# Altium PCB battery_module.PcbDoc
Units mm, origin at the board's own origin, x right, y up, seen from the top; angles counter-clockwise.
Board outline 90 x 25 mm, 2 copper layers (Top Layer, Bottom Layer), stack 2.021 mm thick; 2 components, 2 nets, 6 pads, 2 vias.
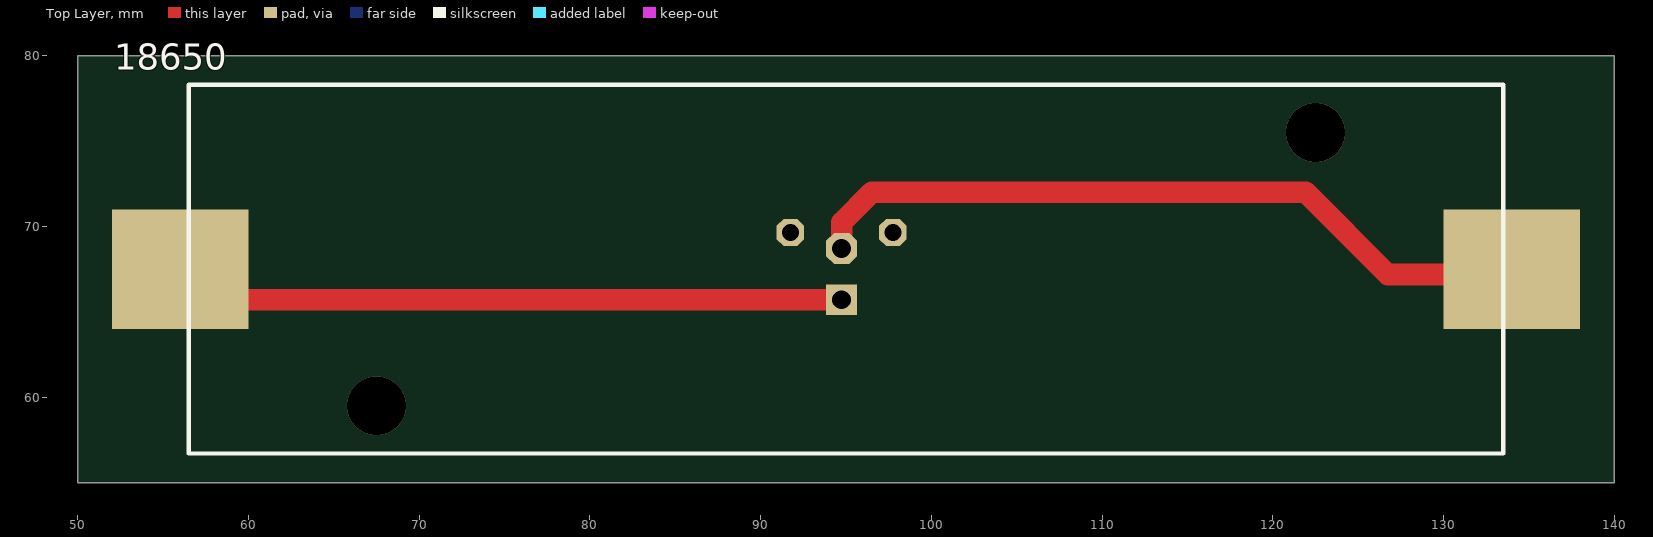
[diagram p0: Top Layer view]
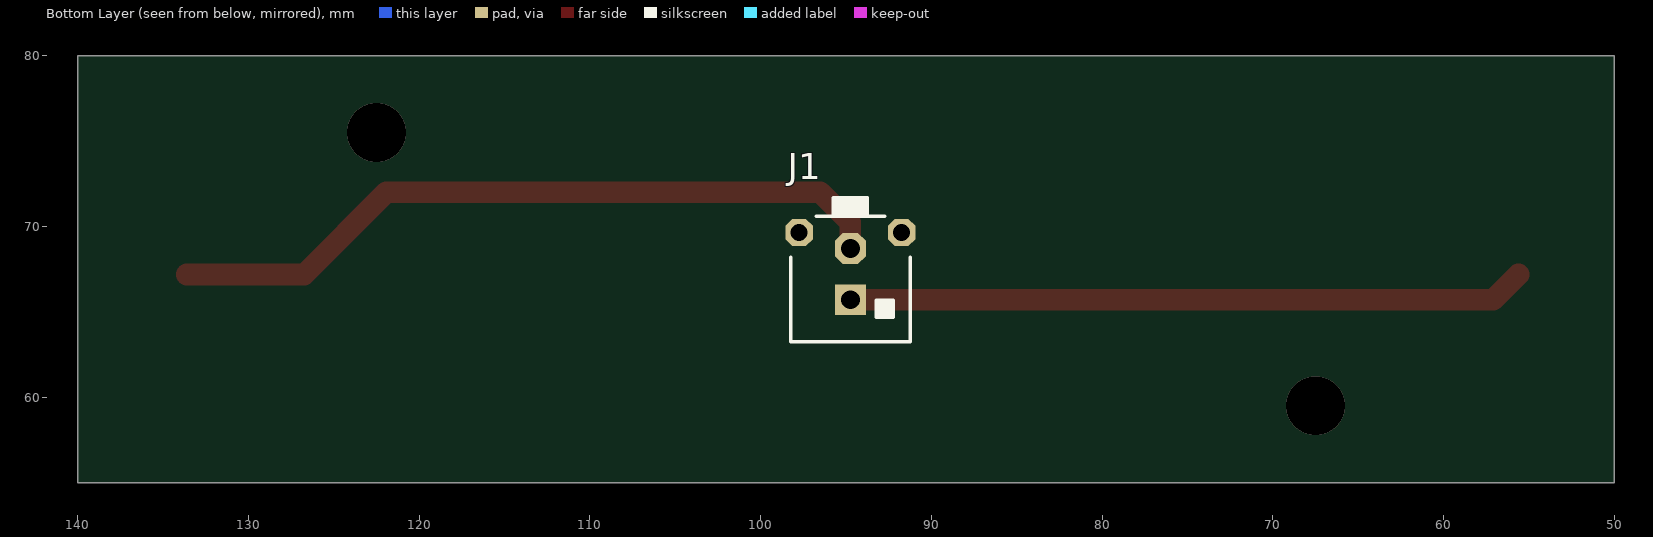
[diagram p1: Bottom Layer view, seen from below]

## Layer stack, top to bottom
Top Solder: solder mask 0.0102, Solder Resist, Dk 3.5
Top Layer: signal copper 0.0356
Dielectric 1: dielectric 1.95, FR-4, Dk 4.8
Bottom Layer: signal copper 0.0356
Bottom Solder: solder mask 0.0102, Solder Resist, Dk 3.5

## Board outline
50,55 50,80 140,80 140,55

## Design rules (kind name [scope] priority, off if disabled: settings)
Clearance [All] p1: gap=0.254 ignorepadtopadclearanceinfootprint=FALSE except(0: Arc-Hole Track-Hole SMDPad-Hole THPad-Hole Via-Hole Fill-Hole Poly-Hole Region-Hole Text-Hole)
PolygonConnect [All] p1: connectstyle=Relief reliefconductorwidth=0.254 reliefentries=4 polygonreliefangle="90 Angle" airgapwidth=0.254
RoutingVias [All] p1: holewidth=0.711 width=1.27 viastyle="Through Hole" minholewidth=0.711 minwidth=1.27 maxholewidth=0.711 maxwidth=1.27
SolderMaskExpansion [All] p1: expansion=0.102
Width [All] p1: maxlimit=2.54 minlimit=0.254 preferedwidth=1.27
30 further rules are at their usual default settings.

## Components (designator, comment, footprint, x,y, rotation, side; value= is the part's Value field where it differs from the comment)
18650 "18650_cell" PCBComponent_1 95,67.5 r180 top
J1 "Molex Microfit" "MICROFIT 1x2 Vertical" 94.742,68.707 r180 bottom

## Footprints (in the part's own frame and the unit in brackets; to place one, negate y for a bottom-side part, rotate by r counter-clockwise, add the part's x,y. Pads: shape width x height; smd on the part's side, far side on the other; paste and mask are expansions set on the pad)
"MICROFIT 1x2 Vertical" [mm] "Molex Vertical 3.00mm pitch Micro-Fit 3.0 Wire-to-Board Header 430450212"
  rect 1.8x1.8 hole 1.1: 1(0,-3)
  oct 1.8x1.8 hole 1.1: 2(0,0)
  oct 1.6x1.6 hole 1: MH(-3,0.94) MH(3,0.94)
  silkscreen extent -3.5,-5.47 3.5,2.98, body extent -3.57,-5.47 3.58,3.3, height 9.95
PCBComponent_1 [mm]
  rect 8x7 smd: 1(-39,0) 2(39,0)
  silkscreen extent -38.5,-10.8 38.5,10.8, body extent -38.53,-10.32 38.52,10.33, height 14.86

## Part data
J1: library part "Microfit 2x1", Supplier=TME, Symbol="Molex 430450212"

## Via types
v1: diameter 3.45, hole 3.45, Top Layer to Bottom Layer, 2 vias

## Nets (pads, with @x,y where several pads share a name; then routed paths per layer and width w, separated by ;. In a path a pad name is that pad's centre, name@x,y a point inside that pad or via, vN(x,y) a via of type N, cw(c..) or ccw(c..) an arc to the next point about the centre after c; other vN are vias at no path point)
Net18650_0: 18650.1 J1.2 | length 43.1
  Top Layer w1.27: J1.2 94.742,70.231 96.52,72.009 121.92,72.009 126.746,67.183 18650.1@133.615,67.183
Net18650_1: 18650.2 J1.1 | length 39.7
  Top Layer w1.27: 18650.2@55.615,67.183 57.091,65.707 J1.1
pads on no net: J1.MH
copper on no net:
  other v1: 67.5,59.5 122.5,75.5

## Silkscreen, mask and mechanical layers (free items; w line width, h text height)
Mechanical 1:
  the board outline again, w0.254